# Altium PCB LM2596-4.PcbDoc
Units mm, origin at the board's own origin, x right, y up, seen from the top; angles counter-clockwise.
Board outline 145.16 x 124.21 mm, 2 copper layers (Top Layer, Bottom Layer); 50 components, 16 nets, 134 pads, 6 vias.
Unrouted connection lines stored in the file: 3.
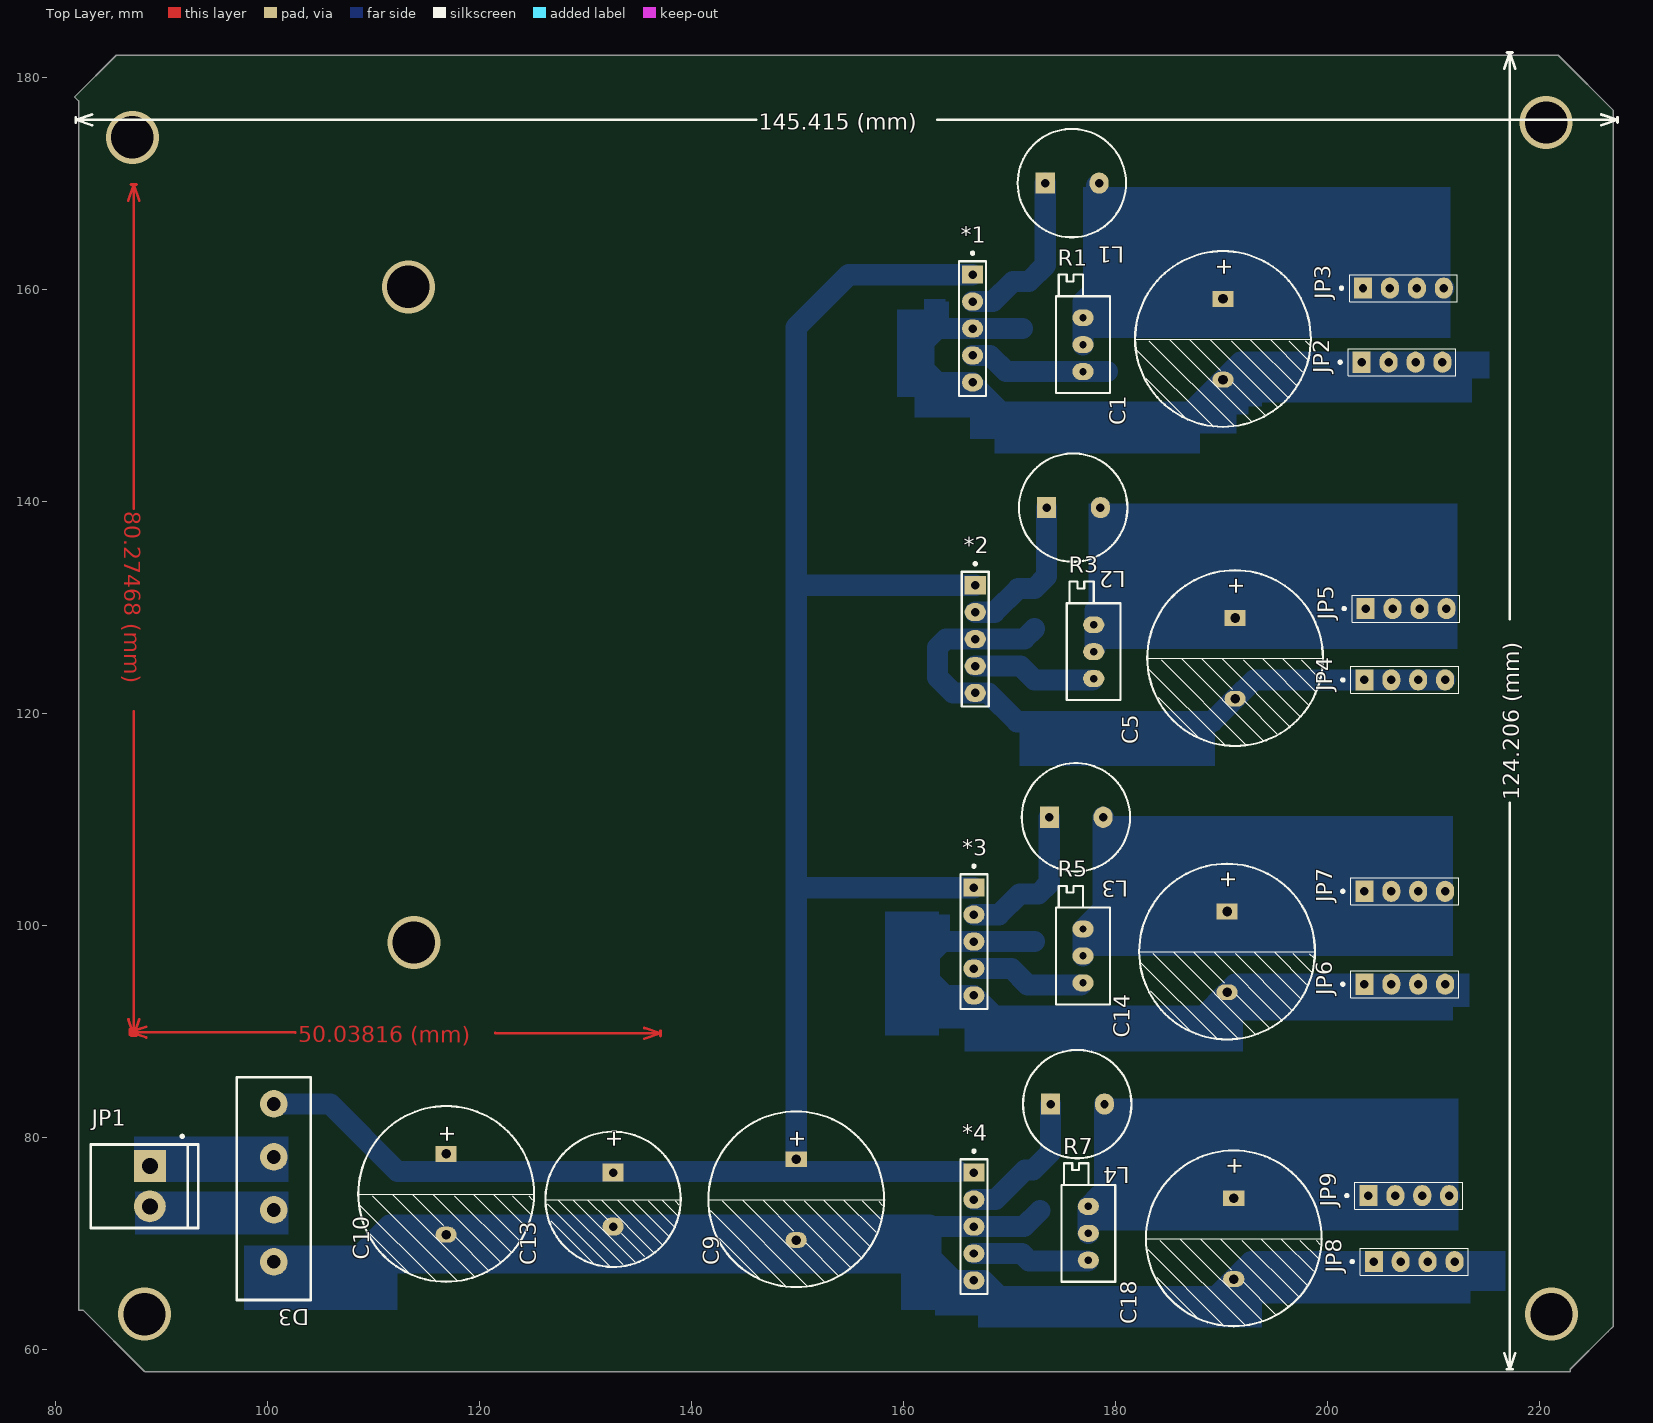
[diagram p0: Top Layer view]
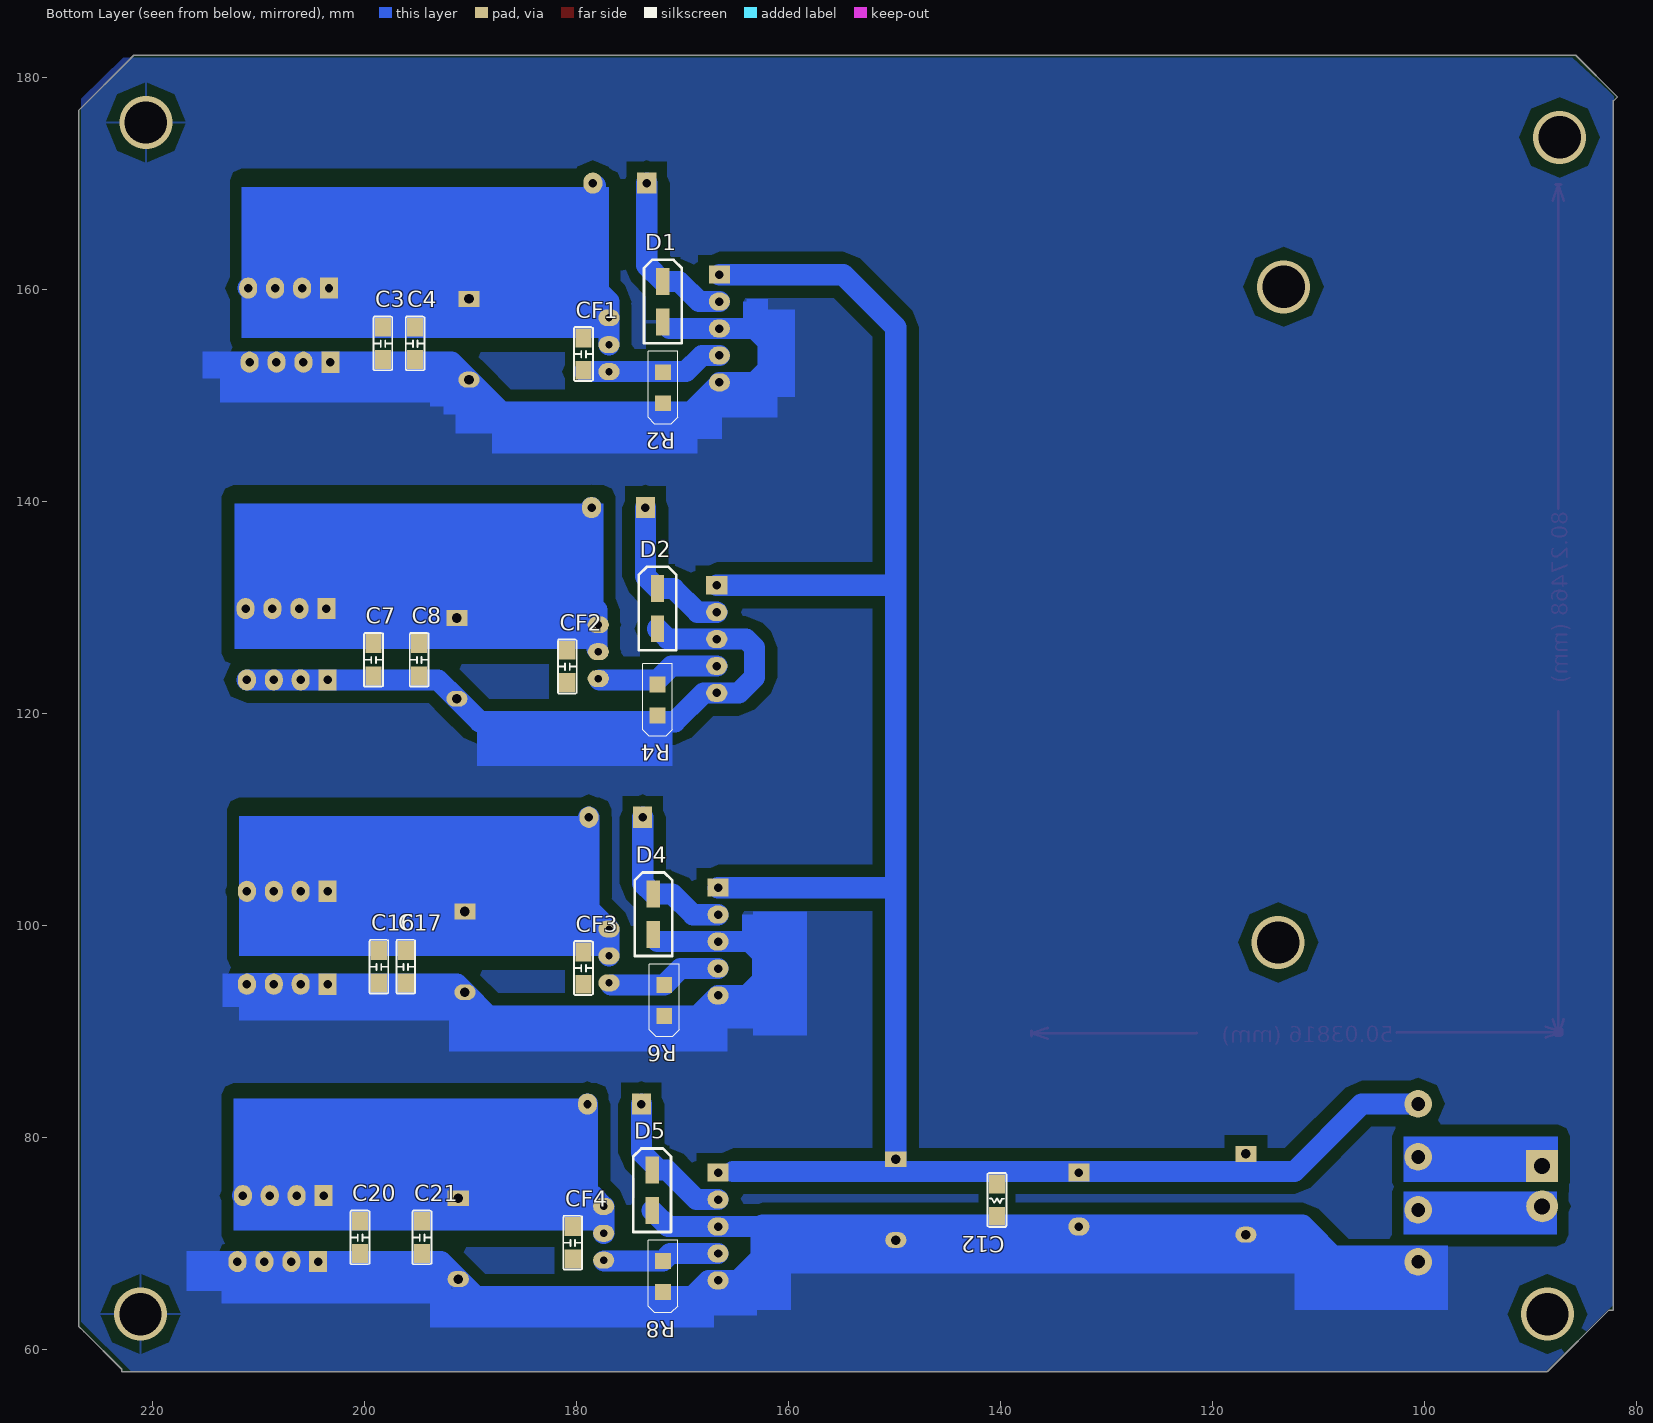
[diagram p1: Bottom Layer view, seen from below]

## Layer stack, top to bottom
Top Layer: signal copper 0.0356
Dielectric: dielectric 0.32, FR-4, Dk 4.8
Bottom Layer: signal copper 0.0356

## Board outline
82.169,63.754 82.586,63.754 88.355,57.985 88.428,57.912 222.885,57.912 222.885,58.166 226.441,61.722 226.949,62.23 226.949,174.498 226.949,176.911 222.123,181.737 221.742,182.118 86.487,182.118 85.725,182.118 81.788,178.181 82.169,177.8 82.169,177.673

## Design rules (kind name [scope] priority, off if disabled: settings)
Clearance [All] p1: gap=1
PolygonConnect [All] p1: connectstyle=Relief reliefconductorwidth=0.254 reliefentries=4 polygonreliefangle="90 Angle"
RoutingVias [All] p1: holewidth=0.711 width=1.27 viastyle="Through Hole" minholewidth=0.711 minwidth=1.27 maxholewidth=0.711 maxwidth=1.27
SilkToSilkClearance [All] p1 off: silktosilkclearance=0.254
SilkscreenOverComponentPads [All] p1 off: minsilkscreentomaskgap=0.254
SolderMaskExpansion [All] p1 off: expansion=0.102
TestPointUsage [All] p1: valid=0 allowmultiple=FALSE
Testpoint [All] p1: side=15 testpointundercomponent=TRUE minsize=1.016 maxsize=2.54 preferedsize=1.524 minholesize=0 maxholesize=1.016 preferedholesize=0.813 testpointgrid=0.025 style=1023 order=0-112345678
Width [All] p1: maxlimit=2 minlimit=1 preferedwidth=1
22 further rules are at their usual default settings.

## Components (designator, comment, footprint, x,y, rotation, side; value= is the part's Value field where it differs from the comment)
*1 "LM2596" HDR1-5 166.497,161.417 r0 top
*2 "LM2596" HDR1-5 166.751,132.122 r0 top
*3 "LM2596" HDR1-5 166.624,103.59 r0 top
*4 "LM2596" HDR1-5 166.624,76.708 r0 top
C1 "Cap Pol1" RB0.3-0.65 190.119,155.321 r90 top
C3 "CAP" CC1005-0402 198.247,153.416 r90 bottom
C4 "CAP" CC1005-0402 195.199,153.416 r90 bottom
C5 "Cap Pol1" RB0.3-0.65 191.262,125.222 r90 top
C7 "CAP" CC1005-0402 199.136,123.571 r90 bottom
C8 "CAP" CC1005-0402 194.818,123.571 r90 bottom
C9 "Cap Pol2" RB0.3-0.65 149.86,74.168 r90 top
C10 "Cap Pol1" RB0.3-0.65 116.84,74.676 r90 top
C12 "Cap Pol1" R-0805 140.716,79.248 r270 bottom
C13 "Cap Pol2" RB0.2-0.50 132.588,74.168 r90 top
C14 "Cap Pol1" RB0.3-0.65 190.5,97.536 r90 top
C16 "CAP" CC1005-0402 198.628,94.615 r90 bottom
C17 "CAP" CC1005-0402 196.088,94.615 r90 bottom
C18 "Cap Pol1" RB0.3-0.65 191.135,70.485 r90 top
C20 "CAP" CC1005-0402 200.406,69.088 r90 bottom
C21 "CAP" CC1005-0402 194.564,69.088 r90 bottom
CF1 "CAP" CC1005-0402 179.324,152.4 r90 bottom
CF2 "CAP" CC1005-0402 180.848,122.936 r90 bottom
CF3 "CAP" CC1005-0402 179.324,94.488 r90 bottom
CF4 "CAP" CC1005-0402 180.34,68.58 r90 bottom
D1 "Diode" Diode-5817 171.831,158.877 r90 bottom
D2 "Diode" Diode-5817 172.339,129.921 r90 bottom
D3 "Bridge1" qiao 100.584,68.199 r180 top
D4 "Diode" Diode-5817 172.72,101.092 r90 bottom
D5 "Diode" Diode-5817 172.847,75.057 r90 bottom
JP1 "Header 2" H-2/2 88.9,77.343 r0 top
JP2 "Header 4" HDR1-4 203.2,153.162 r90 top
JP3 "Header 4" HDR1-4 203.327,160.147 r90 top
JP4 "Header 4" HDR1-4 203.454,123.19 r90 top
JP5 "Header 4" HDR1-4 203.581,129.921 r90 top
JP6 "Header 4" HDR1-4 203.454,94.488 r90 top
JP7 "Header 4" HDR1-4 203.454,103.251 r90 top
JP8 "Header 4" HDR1-4 204.343,68.326 r90 top
JP9 "Header 4" HDR1-4 203.835,74.549 r90 top
L1 "INDUCTOT" RBL0.2 175.895,170.053 r180 top
L2 "INDUCTOT" RBL0.2 176.022,139.446 r180 top
L3 "INDUCTOT" RBL0.2 176.276,110.236 r180 top
L4 "INDUCTOT" RBL0.2 176.403,83.185 r180 top
R1 "RES-Pot2" VR-S 176.911,152.273 r0 top
R2 "Res" 1n4148 171.831,150.749 r270 bottom
R3 "RES-Pot2" VR-S 177.927,123.317 r0 top
R4 "Res" 1n4148 172.339,121.285 r270 bottom
R5 "RES-Pot2" VR-S 176.911,94.615 r0 top
R6 "Res" 1n4148 171.704,92.964 r270 bottom
R7 "RES-Pot2" VR-S 177.419,68.453 r0 top
R8 "Res" 1n4148 171.831,66.929 r270 bottom

## Footprints (in the part's own frame and the unit in brackets; to place one, negate y for a bottom-side part, rotate by r counter-clockwise, add the part's x,y. Pads: shape width x height; smd on the part's side, far side on the other; paste and mask are expansions set on the pad)
1n4148 [mm]
  rect 1.5x1.5 smd: 1(-1.46,0) 2(1.46,0)
  silkscreen extent -3.43,-1.4 3.43,1.4
CC1005-0402 [mil]
  rect 70x60 smd: 1(0,0) 2(120,0)
  silkscreen extent -40,-35 160,35
Diode-5817 [mm]
  rect 2.54x1.27 smd: 1(-1.905,0) 2(1.905,0)
  silkscreen extent -3.94,-1.78 3.94,1.78
H-2/2 [mm]
  rect 3x3 hole 1.5: 1(0,0)
  round 3 hole 1.5: 2(0,-3.81)
  silkscreen extent -5.59,-5.84 4.57,2.92
HDR1-4 [mm]
  rect 2x1.7 hole 0.8 unplated: 1(0,0)
  oval 2x1.7 hole 0.8 unplated: 2(0,-2.54) 3(0,-5.08) 4(0,-7.62)
  silkscreen extent -1.27,-8.89 1.27,2.15
HDR1-5 [mm]
  rect 2x1.7 hole 0.8: 1(0,0)
  oval 2x1.7 hole 0.8: 2(0,-2.54) 3(0,-5.08) 4(0,-7.62) 5(0,-10.16)
  silkscreen extent -1.27,-11.43 1.27,2.15
qiao [mm]
  round 2.6 hole 1.3: 1(0,-0.1) 2(0,-5) 3(0,-15) 4(0,-10)
  silkscreen extent -3.5,-17.5 3.5,3.5
R-0805 [mil]
  rect 70x60 smd: 1(141.73,15.75) 2(261.73,15.75)
  silkscreen extent 102,-19 302,51
RB0.2-0.50 [mm]
  rect 1.7x2 hole 0.8 unplated: 1(2.54,0)
  oval 1.7x2 hole 0.8 unplated: 2(-2.54,0)
  silkscreen extent -6.35,-6.38 6.41,6.38
RB0.3-0.65 [mm]
  rect 1.5x2 hole 0.9: 1(3.81,0)
  oval 1.5x2 hole 0.9: 2(-3.81,0)
  silkscreen extent -8.25,-8.38 8.32,8.29
RBL0.2 [mm]
  rect 1.8x2 hole 0.8: 1(2.54,0)
  oval 1.8x2 hole 0.8: 2(-2.54,0)
  silkscreen extent -5.08,-5.11 5.14,5.11
VR-S [mm]
  oval 2x1.6 hole 0.7: 1(0,0) 2(0,2.54) 3(0,5.08)
  silkscreen extent -2.54,-2.03 2.54,9.14

## Part data
C1 C5 C10 C12 C14 C18: "Polarized Capacitor (Radial)"
C3 C4 C7 C8 C16 C17 C20 C21 CF1 CF2 CF3 CF4: "Capacitor"
C9 C13: "Polarized Capacitor (Axial)"
D1 D2 D4 D5: "Default Diode"
D3: "Full Wave Diode Bridge"
JP1: "Header, 2-Pin"
JP2 JP3 JP4 JP5 JP6 JP7 JP8 JP9: "Header, 4-Pin"
L1 L2 L3 L4: "Inductor"
R1 R3 R5 R7: "Potentiometer"
R2 R4 R6 R8: "Resistor"

## Via types
v1: diameter 5, hole 4, Top Layer to Bottom Layer, 6 vias

## Nets (pads, with @x,y where several pads share a name; then routed paths per layer and width w, separated by ;. In a path a pad name is that pad's centre, name@x,y a point inside that pad or via, vN(x,y) a via of type N, cw(c..) or ccw(c..) an arc to the next point about the centre after c; other vN are vias at no path point)
GND: *1.3 *1.5 *2.3 *2.5 *3.3 *3.5 *4.3 *4.5 C1.2 C3.1 C4.1 C5.2 C7.1 C8.1 C9.2 C10.2 C12.2 C13.2 C14.2 C16.1 C17.1 C18.2 C20.1 C21.1 D1.1 D2.1 D3.1 D4.1 D5.1 JP2.1 JP2.2 JP2.3 JP2.4 JP4.1 JP4.2 JP4.3 JP4.4 JP6.1 JP6.2 JP6.3 JP6.4 JP8.1 JP8.2 JP8.3 JP8.4 R2.2 R4.2 R6.2 R8.2 | length 321.7
  Bottom Layer w2: D3.1 108.05,68.299 111.506,71.755 132.588,71.755 162.433,71.755 ; *1.5 163.195,151.257 161.925,152.527 161.925,155.067 163.195,156.337 *1.3 171.196,156.337 ; *1.5@166.751,150.876 169.164,148.463 187.071,148.463 C1.2 191.77,153.162 JP2.2 JP2.4 ; D4.1@172.339,98.51 *3.3 163.661,98.51 162.433,97.282 162.433,94.869 163.872,93.43 *3.5 168.55,91.504 R6.2 188.278,91.504 C14.2 191.262,94.488 JP6.1 JP6.2 ; D2.1 171.365,127.042 *2.3 163.999,127.042 163.195,126.238 163.195,123.444 164.677,121.962 *2.5 167.979,121.962 170.688,119.253 189.103,119.253 C5.2 193.04,123.19 JP4.1 JP4.2 JP4.3 JP4.4 ; D5.1 171.323,71.628 *4.3 162.56,71.628 162.56,68.707 164.719,66.548 *4.5 167.513,66.548 169.037,65.024 189.484,65.024 C18.2 192.786,68.326 JP8.1 JP8.2 JP8.3 JP8.4@211.836,68.326 ; JP6.2@205.994,94.551 JP6.4@211.01,94.551
  other v1: 221.107,63.373 220.599,175.768
Net*1_1: *1.1 *2.1 *3.1 *4.1 C9.1 C10.1 C12.1 C13.1 D3.3 | length 197.3
  Bottom Layer w2: D3.3 105.904,83.199 112.268,76.835 165.214,76.835 ; C9.1 149.86,156.464 154.813,161.417 *1.1 ; 150.156,132.122 *2.1 ; 150.326,103.59 *3.1
Net*1_2: *1.2 D1.2 L1.1 | length 16
  Bottom Layer w2: *1.2 168.402,158.877 170.307,160.782 D1.2 173.355,162.306 L1.1
Net*1_4: *1.4 CF1.1 R1.1 R2.1 | length 13.3
  Bottom Layer w2: *1.4 168.148,153.797 169.672,152.273 R1.1 CF1.1@179.197,152.273
Net*2_2: *2.2 D2.2 L2.1 | length 14.6
  Bottom Layer w2: *2.2 168.571,129.582 170.815,131.826 D2.2 173.482,132.969 L2.1
Net*2_4: *2.4 CF2.1 R3.1 R4.1 | length 11.6
  Bottom Layer w2: *2.4 171.027,124.502 172.339,123.19 R3.1@177.8,123.19
Net*3_2: *3.2 D4.2 L3.1 | length 14.6
  Bottom Layer w2: *3.2 168.995,101.05 170.942,102.997 D4.2 173.736,104.013 L3.1
Net*3_4: *3.4 CF3.1 R5.1 R6.1 | length 10.7
  Bottom Layer w2: *3.4 170.159,95.97 R6.1 R5.1@176.72,94.424
Net*4_2: *4.2 D5.2 L4.1 | length 13.7
  Bottom Layer w2: *4.2 168.656,74.168 171.45,76.962 172.212,76.962 173.863,78.613 L4.1
Net*4_4: *4.4 CF4.1 R7.1 R8.1 | length 11
  Bottom Layer w2: *4.4 171.132,69.088 R8.1 R7.1@177.356,68.389
NetD3_2: D3.2 JP1.2 | length 11.4
  Bottom Layer w2: JP1.2 D3.2@100.25,73.533
NetD3_4: D3.4 JP1.1 | length 10.8
  Bottom Layer w2: JP1.1 D3.4@99.728,77.343
OUT1: C1.1 C3.2 C4.2 CF1.2 JP3.1 JP3.2 JP3.3 JP3.4 L1.2 R1.2 R1.3 | length 47.9
  Bottom Layer w2: R1.2 176.911,158.496 ; 176.911,158.877 178.181,160.147 ; L1.2@178.181,169.799 178.181,160.147 ; JP3.4 JP3.3 JP3.2 JP3.1 178.181,160.147
OUT2: C5.1 C7.2 C8.2 CF2.2 JP5.1 JP5.2 JP5.3 JP5.4 L2.2 R3.2 R3.3 | length 46
  Bottom Layer w2: R3.2@178.054,126.111 178.054,129.794 178.181,129.921 JP5.1 JP5.2 JP5.3 JP5.4 ; 178.562,130.302 L2.2
OUT3: C14.1 C16.2 C17.2 CF3.2 JP7.1 JP7.2 JP7.3 JP7.4 L3.2 R5.2 R5.3 | length 45.3
  Bottom Layer w2: R5.2 R5.3 180.086,102.87 190.5,102.87 208.534,102.87 JP7.4@210.693,102.87 ; 178.816,102.616 L3.2
OUT4: C18.1 C20.2 C21.2 CF4.2 JP9.1 JP9.2 JP9.3 JP9.4 L4.2 R7.2 R7.3 | length 44.9
  Bottom Layer w2: R7.2 R7.3 178.435,74.549 JP9.1 JP9.2 JP9.3 JP9.4 ; 178.943,75.311 L4.2
copper on no net: | length 107.3
  Top Layer w0.254: 86.868,168.402 87.376,169.926 ; 86.871,91.175 87.379,89.651 ; 87.019,89.727 87.02,90.235 ; 87.122,169.926 87.63,169.926 ; 87.125,89.651 87.633,89.651 ; 87.377,139.336 87.376,169.926 ; 87.378,120.241 87.379,89.651 ; 87.884,168.402 87.376,169.926 ; 87.887,91.175 87.379,89.651 ; 88.542,89.47 87.02,89.981 ; 88.545,90.486 87.02,89.981 ; 102.618,89.942 87.02,89.981 ; 121.459,89.894 137.058,89.854 ; 135.532,89.35 137.058,89.854 ; 135.535,90.366 137.058,89.854 ; 137.057,89.6 137.058,90.108
  other v1: 88.392,63.373 113.792,98.425 113.284,160.274 87.249,174.371

## Polygon pours and split planes (outlines as drawn)
GND on Bottom Layer "Top Layer-No Net" (solid): 86.075,181.864 222.752,181.864 226.695,177.989 226.695,177.472 226.695,62.635 221.964,57.985 88.572,57.985 82.132,64.314 82.132,178.247 82.658,178.764

## Other copper
Top Layer:
  text "80.27468 (mm)" at 86.463,139.082 h1.52 r270
  text "50.03816 (mm)" at 102.87,89.027 h1.52 r359.85
Bottom Layer:
  rectangle net GND: 210.82,151.638 215.265,154.178
  rectangle net GND: 191.135,149.352 213.614,153.035
  rectangle net GND: 189.738,149.733 191.643,150.622
  rectangle net GND: 190.47,148.971 193.802,151.862
  rectangle net GND: 189.103,148.209 192.532,150.114
  rectangle net GND: 187.706,146.431 191.389,149.225
  rectangle net GND: 166.243,145.923 170.815,148.717
  rectangle net GND: 161.036,147.955 168.148,150.749
  rectangle net GND: 163.576,156.337 164.253,158.877
  rectangle net GND: 161.925,156.337 163.957,159.131
  rectangle net GND: 159.385,149.86 162.687,158.115
  rectangle net GND: 211.074,92.329 213.36,95.504
  rectangle net GND: 189.357,91.059 211.836,93.726
  rectangle net GND: 165.735,88.138 192.024,91.821
  rectangle net GND: 162.814,90.297 167.64,93.345
  rectangle net GND: 163.068,99.06 164.38,101.05
  rectangle net GND: 158.242,89.662 163.322,101.346
  rectangle net GND: 211.963,65.532 216.789,69.342
  rectangle net GND: 191.77,64.389 213.487,67.437
  rectangle net GND: 167.005,62.103 193.802,65.786
  rectangle net GND: 162.941,63.246 167.386,66.167
  rectangle net GND: 159.766,63.754 163.957,67.564
  rectangle net GND: 110.744,67.183 162.687,72.263
  rectangle net GND: 97.79,63.754 112.268,69.85
  rectangle net GND: 170.942,115.062 189.357,119.253
  rectangle net GND: 168.561,144.526 187.96,149.066
  rectangle net OUT4: 178.054,71.247 212.344,83.693
  rectangle net OUT3: 177.8,97.155 211.836,110.363
  rectangle net OUT2: 177.419,126.111 212.217,139.827
  rectangle net OUT1: 176.911,155.448 211.582,169.672
  rectangle net NetD3_2: 87.503,70.866 101.981,74.93
  rectangle net NetD3_4: 87.376,75.819 101.981,80.137

## Silkscreen, mask and mechanical layers (free items; w line width, h text height)
Top Overlay:
  lines w0.254: 81.915,175.768 81.915,176.276 ; 83.439,175.514 81.915,176.022 ; 83.439,176.53 81.915,176.022 ; 146.091,176.022 81.915,176.022 ; 163.154,176.022 227.33,176.022 ; 216.662,59.69 217.17,58.166 ; 216.662,180.848 217.17,182.372 ; 216.916,58.166 217.424,58.166 ; 216.916,182.372 217.424,182.372 ; 217.17,111.61 217.17,58.166 ; 217.17,128.928 217.17,182.372 ; 217.678,59.69 217.17,58.166 ; 217.678,180.848 217.17,182.372 ; 225.806,175.514 227.33,176.022 ; 225.806,176.53 227.33,176.022 ; 227.33,175.768 227.33,176.276
  text "145.415 (mm)" at 146.345,175.108 h1.52
  text "124.206 (mm)" at 218.084,111.864 h1.52 r90

## Text inside footprints (layer, text, board x,y; h text height)
C1: Top Overlay "+" at 190.881,161.29 h1.5 r90
C5: Top Overlay "+" at 192.024,131.191 h1.5 r90
C9: Top Overlay "+" at 150.622,78.994 h1.5 r90
C10: Top Overlay "+" at 117.602,79.502 h1.5 r90
C13: Top Overlay "+" at 133.35,78.994 h1.5 r90
C14: Top Overlay "+" at 191.262,103.505 h1.5 r90
C18: Top Overlay "+" at 191.897,76.454 h1.5 r90